# Altium PCB PCB.PcbDoc
Units mil, origin at the board's own origin, x right, y up, seen from the top; angles counter-clockwise.
Board outline 925 x 915 mil, 2 copper layers (Top Layer, Bottom Layer); 9 components, 8 nets, 20 pads, 0 vias.
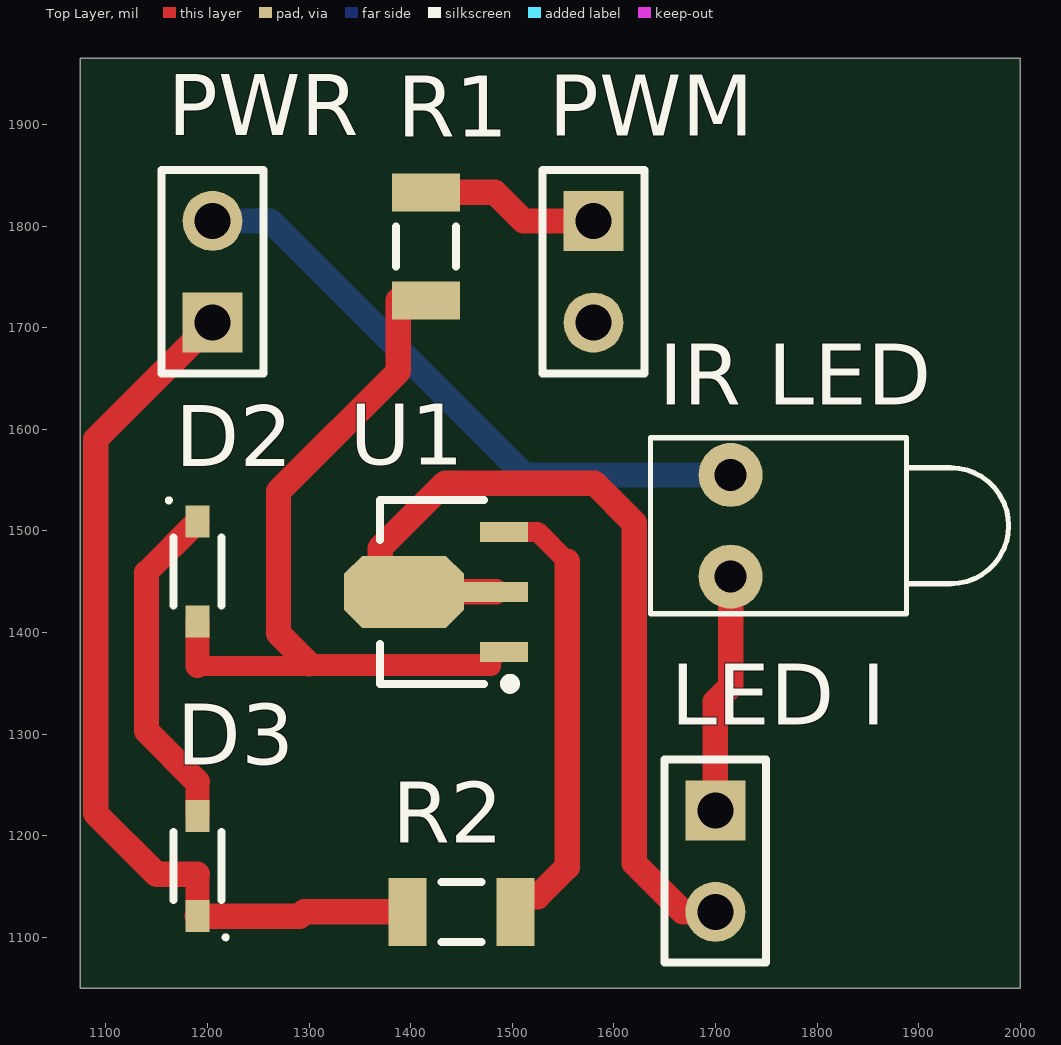
[diagram p0: Top Layer view]
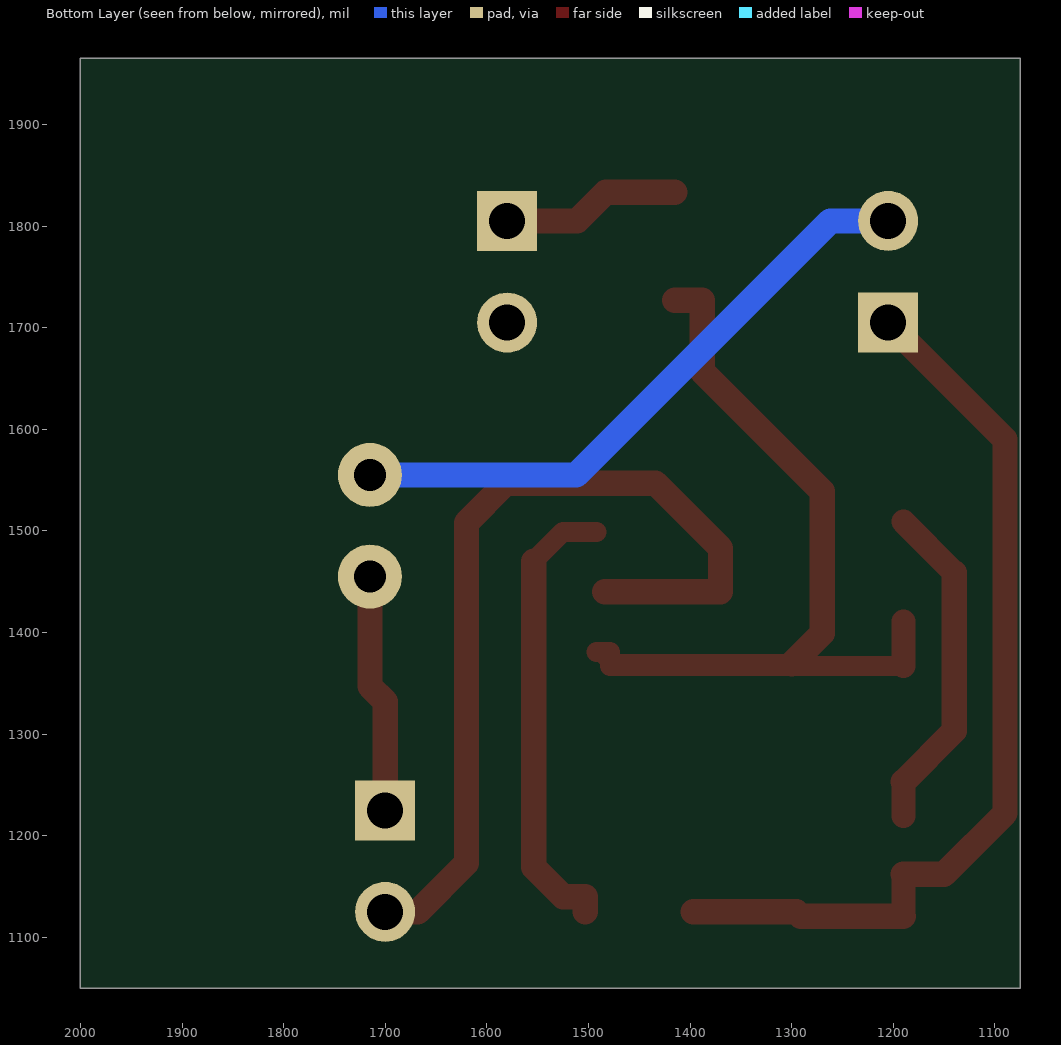
[diagram p1: Bottom Layer view, seen from below]

## Layer stack, top to bottom
Top Solder: solder mask 0.4, Solder Resist, Dk 3.5
Top Layer: signal copper 1.4
Dielectric 1: dielectric 12.6, FR-4, Dk 4.8
Bottom Layer: signal copper 1.4
Bottom Solder: solder mask 0.4, Solder Resist, Dk 3.5

## Board outline
1075,1050 2000,1050 2000,1965 1075,1965

## Design rules (kind name [scope] priority, off if disabled: settings)
Clearance [All] p1: gap=25
PolygonConnect [All] p1: connectstyle=Relief reliefconductorwidth=10 reliefentries=4 polygonreliefangle="90 Angle" airgapwidth=10
RoomDefinition Sheet1 [InComponentClass('Sheet1')] p1: confinementstyle=ConfineIn formatcopy=TRUE lockcomponents=FALSE outline 1075,1050 2000,1050 2000,1965 1075,1965
RoutingVias [All] p1: holewidth=28 width=50 viastyle="Through Hole" minholewidth=28 minwidth=50 maxholewidth=28 maxwidth=50
SMDNeckDown [All] p1: percent=100.000
SolderMaskExpansion [All] p1: expansion=4
Width [All] p1: maxlimit=25 minlimit=18 preferedwidth=25 minimp=50.000000 maximp=50.000000 favimp=50.000000
30 further rules are at their usual default settings.

## Components (designator, comment, footprint, x,y, rotation, side; value= is the part's Value field where it differs from the comment)
D2 "BAS21-03W" INF-SOD323_V 1190,1460 r0 top
D3 "BAS21-03W" INF-SOD323_V 1190,1170 r180 top
"IR LED" "IRLED" LED-1 1715,1505 r0 top (schematic designator D1)
"LED I" "LED I" HDR1X2 1700,1225 r270 top
PWM "PWM" HDR1X2 1580,1805 r270 top
PWR "PWR" HDR1X2 1205,1705 r90 top
R1 "7K5 5% 1206(3216)" RESC1206(3216)_L 1415,1780 r90 top
R2 "3R3 5% 1206(3216)" RESC1206(3216)_L 1450,1125 r0 top
U1 "ADL5536ARKZ-R7" ADI-RK-3_L 1425,1440 r180 top

## Footprints (in the part's own frame and the unit in brackets; to place one, negate y for a bottom-side part, rotate by r counter-clockwise, add the part's x,y. Pads: shape width x height; smd on the part's side, far side on the other; paste and mask are expansions set on the pad)
ADI-RK-3_L [mm] "SOT89, 3-Leads, Body 4.5x2.4 mm, Pitch 1.5mm, Lead Span 4.1mm, IPC High Density"
  rect 1.2x0.5 smd: 1(-1.7,1.5) 3(-1.7,-1.5)
  rect 1.6x0.5 smd: 2(-1.5,0)
  oct 3x1.8 smd: 2(0.8,0)
  silkscreen extent -1.98,-2.3 1.4,2.42, body extent -1.2,-2.3 1.4,2.3, height 1.6
HDR1X2 [mm] "Connector; Header; 2 Position"
  rect 1.5x1.5 hole 0.9: 1(0,0)
  round 1.5 hole 0.9: 2(2.54,0)
  silkscreen extent -1.27,-1.27 3.81,1.27
INF-SOD323_V [mm] "SOD, 2-Leads, Body 1.7x1.25 mm"
  rect 0.6x0.8 smd: 1(0,1.25) 2(0,-1.25)
  silkscreen extent -0.76,-0.85 0.6,1.83, body extent -0.63,-0.85 0.63,0.85, height 1.1
LED-1 [mm] "LED; 2 Leads"
  round 1.6 hole 0.8: 1(0,1.27) 2(0,-1.27)
  silkscreen extent -2,-2.2 6.95,2.2
RESC1206(3216)_L [mm] "Chip Resistor, Body 3.2x1.6mm, IPC High Density"
  rect 0.95x1.7 smd: 1(-1.35,0) 2(1.35,0)
  silkscreen extent -0.5,-0.75 0.5,0.75, body extent -1.67,-0.87 1.67,0.87, height 0.75

## Part data
D2 D3: library part CMP-1176-00009-1, "Silicon Switching Diode, SOD323, Reel, Green"
"IR LED": library part LED1, "Typical RED GaAs LED"
"LED I" PWM PWR: library part "Header 2", "Header, 2-Pin"
R1: library part CMP-1014-00095-1, "7K5 0.25W 5% 1206 (3216 Metric)  SMD"
R2: library part CMP-1014-00014-1, "3R3 0.25W 5% 1206 (3216 Metric)  SMD"
U1: library part CMP-0291-00032-1, "20 MHz to 1.0 GHz IF Gain Block, 5.5V, RK-3, 1000 Reel, Pb-Free"

## Nets (pads, with @x,y where several pads share a name; then routed paths per layer and width w, separated by ;. In a path a pad name is that pad's centre, name@x,y a point inside that pad or via, vN(x,y) a via of type N, cw(c..) or ccw(c..) an arc to the next point about the centre after c; other vN are vias at no path point)
DIODES: D2.1 D3.2 | length 331.4
  Top Layer w23.62: 1140,1459 1190,1509 D2.1 ; D3.2 1190,1253
  Top Layer w25: 1140,1459 1140,1303 1190,1253
GATE: D2.2 R1.1 U1.1 | length 997.8
  Top Layer w19.68: 1190,1367 1479,1367 U1.1@1479,1372.94 ; 1300,1369 1475.06,1369 U1.1@1479,1372.94 ; U1.1 U1.1@1487,1380.94 ; U1.1@1479,1372.94 1479,1380.94 U1.1@1487,1380.94 ; U1.1@1479,1372.94 U1.1@1487,1380.94
  Top Layer w23.62: 1190,1367 D2.2
  Top Layer w25: 1300,1369 1270,1399 1270,1539 1388,1657 1388,1726.85 R1.1
LED+: "IR LED.1" PWR.2 | length 613.6
  Bottom Layer w25: PWR.2 1262,1805 1512,1555 1715,1555
LED-: R2.2 U1.3 | length 453
  Top Layer w19.68: U1.3 1525,1499.06 1554,1470.06
  Top Layer w25: R2.2 1503.15,1140 1525,1140 1554,1169 1554,1470.06
NetD1_2: "IR LED.2" "LED I.1" | length 236.2
  Top Layer w25: 1700,1225 1700,1332 1715,1347 1715,1455
"NetLED I_2": "LED I.2" U1.2 | length 884.6
  Top Layer w25: U1.2@1484.06,1440 1393.5,1440 1370,1440 1370,1483 1434,1547 1581,1547 1620,1508 1620,1173 1668,1125 1700,1125
NetPWM_1: PWM.1 R1.2 | length 176.7
  Top Layer w25: R1.2 1483,1833.15 1511.15,1805 PWM.1
VCC: D3.1 PWR.1 R2.1 | length 905.3
  Top Layer w23.62: D3.1 1190,1162
  Top Layer w25: D3.1 1291,1120.79 1295.21,1125 R2.1 ; 1190,1162 1150,1162 1090,1222 1090,1590 PWR.1
pads on no net: PWM.2